# EAGLE board schemat (EAGLE 7.2.0)
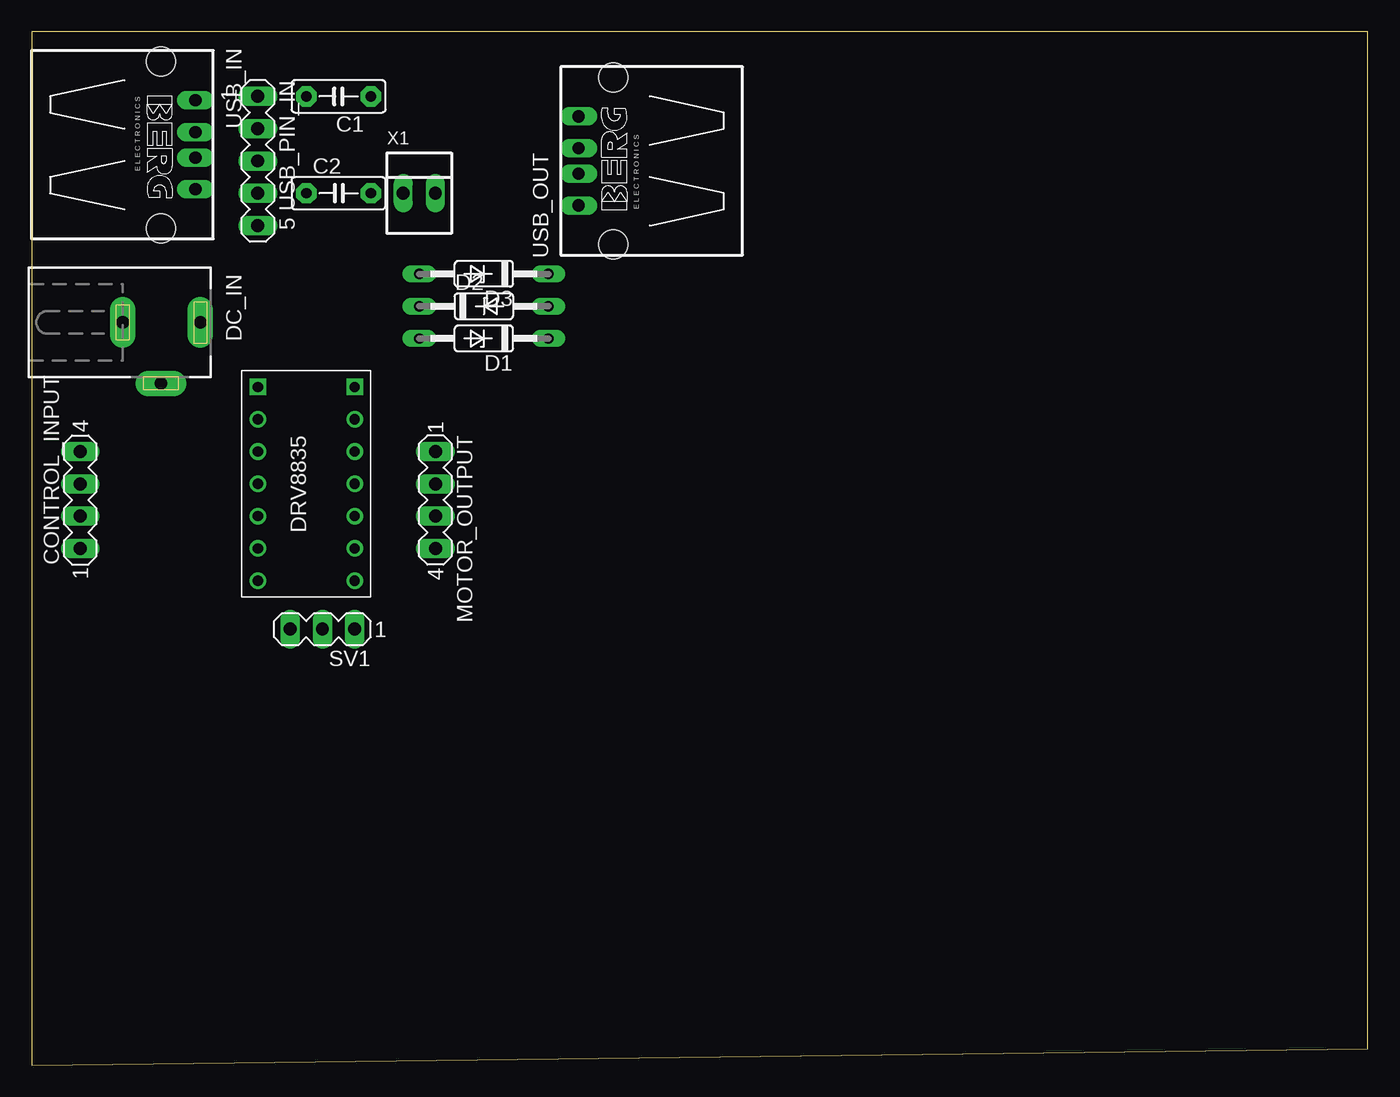
[diagram p0: board, top side]
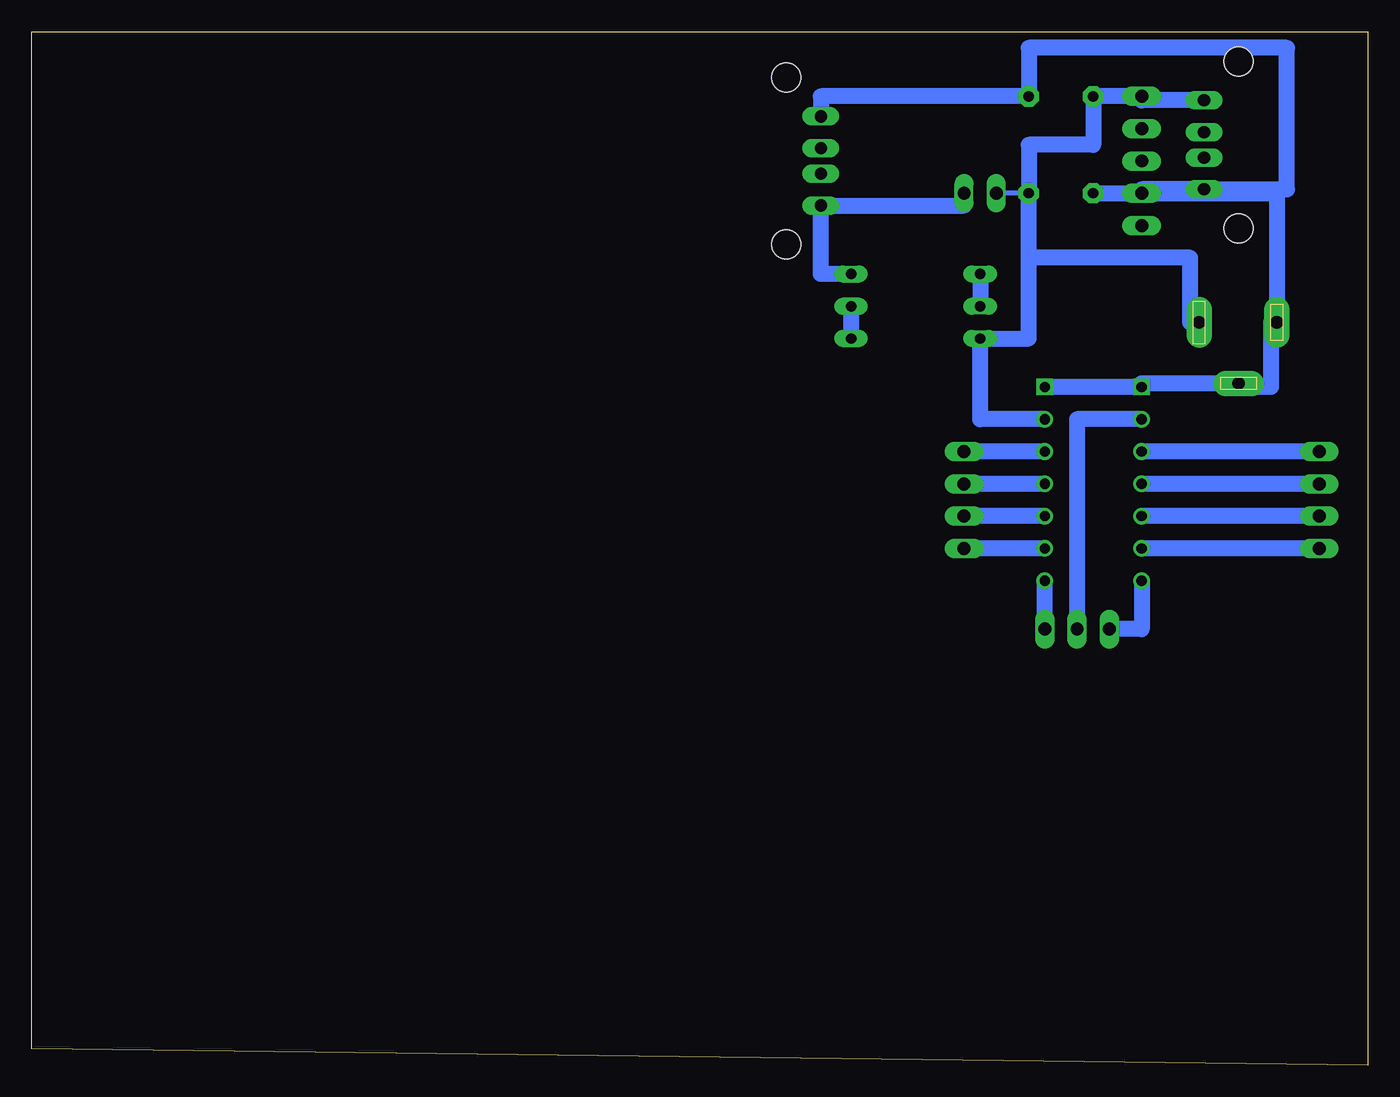
[diagram p1: board, bottom side, seen from below]

Size 105.08 x 81.27 mm. Coordinates in mm from the lower left corner, seen from the top.
Outline: 0,0 105.08,1.27 105.08,81.27 0,81.27 0,0
Copper layers (1*16): Top 0.035mm / dielectric 1.5mm / Bottom 0.035mm
Design rules "default *": minimum track width 15mil, minimum drill 24mil, track to track 8mil, track to pad 8mil, pad to pad 8mil, via to via 8mil, smd to smd 8mil, copper to edge 40mil, drill to drill 8mil, minimum pad ring 10mil, minimum via ring 8mil, stop-mask expansion 4mil, vias tented up to drill 0mil, thermal gap 10mil

## Footprints (pad centres in the part's own frame; a part is rotated, then mirrored left to right if it is on the bottom)
C5B2.5 = drill 0.813 pad 1.6 octagon: 1 -2.54,0; 2 2.54,0
MA04-1 = drill 1.016 long: 1 -3.81,0; 2 -1.27,0; 3 1.27,0; 4 3.81,0
DO35Z10 = drill 0.813 long: A 5.08,0; C -5.08,0
DCJ0202 = drill 1 pad 2 long: 1 0,3.1; 2 4.8,0; 3 0,-3
MA03-1 = drill 1.016 long: 1 -2.54,0; 2 0,0; 3 2.54,0
POLOLU_MOTOR_DRV_DRV8835 = drill 0.8: AENBL 1.27,6.35; AOUT1 8.89,3.81; AOUT2 8.89,6.35; APHASE 1.27,3.81; BENBL 1.27,11.43; BOUT1 8.89,8.89; BOUT2 8.89,11.43; BPHASE 1.27,8.89; MODE 1.27,1.27; VCC 1.27,13.97; VIN 8.89,13.97; VMM 8.89,1.27 | drill 0.8 square: LGND 1.27,16.51; MGND 8.89,16.51
PN87520 = drill 0.95 long: 1 -3.5,2.71; 2 -1,2.71; 3 1,2.71; 4 3.5,2.71 | hole 2.3: -6.57,0; 6.57,0
MA05-1 = drill 1.016 long: 1 -5.08,0; 2 -2.54,0; 3 0,0; 4 2.54,0; 5 5.08,0
22-23-2021 = drill 1 long: 1 -1.27,0; 2 1.27,0

## Placement (x,y rotation side)
C1  [C5B2.5]  24.13,76.2 180 top
C2  [C5B2.5]  24.13,68.58 0 top
CONTROL_INPUT  [MA04-1]  3.81,44.45 90 top
D1  1N821  [DO35Z10]  35.56,57.15 180 top
D2  1N821  [DO35Z10]  35.56,59.69 0 top
D3  1N821  [DO35Z10]  35.56,62.23 180 top
DC_IN  DCJ0202  [DCJ0202]  10.16,58.42 270 top
MOTOR_OUTPUT  [MA04-1]  31.75,44.45 270 top
SV1  [MA03-1]  22.86,34.29 180 top
U$1  POLOLU_MOTOR_DRV8835THROUGHHOLE  [POLOLU_MOTOR_DRV_DRV8835]  16.51,36.83 0 top
USB_IN  [PN87520]  10.16,72.39 270 top
USB_OUT  [PN87520]  45.72,71.12 90 top
USB_PIN_IN  [MA05-1]  17.78,71.12 270 top
X1  22-23-2021  [22-23-2021]  30.48,68.58 0 top

## Library data of the parts
C1 C2 = capacitor-wima
CONTROL_INPUT MOTOR_OUTPUT SV1 USB_PIN_IN = con-lstb; OC_FARNELL: unknown; OC_NEWARK: unknown
D1-D3 = diode
DC_IN = con-jack; OC_FARNELL: unknown; OC_NEWARK: unknown
U$1 = pololu
USB_IN USB_OUT = con-berg; OC_FARNELL: unknown; OC_NEWARK: unknown
X1 = con-molex; MF: MOLEX; MPN: 22-23-2021; OC_FARNELL: 1462926; OC_NEWARK: 25C3832

## Nets
GND: C1.1 C2.1 DC_IN.2 DC_IN.3 U$1.LGND U$1.MGND USB_IN.4 USB_OUT.4 USB_PIN_IN.4
N$1: SV1.2 U$1.VCC
N$2: SV1.3 U$1.MODE
N$3: CONTROL_INPUT.1 U$1.APHASE
N$4: CONTROL_INPUT.2 U$1.AENBL
N$5: CONTROL_INPUT.3 U$1.BPHASE
N$6: CONTROL_INPUT.4 U$1.BENBL
N$7: MOTOR_OUTPUT.1 U$1.BOUT2
N$8: MOTOR_OUTPUT.2 U$1.BOUT1
N$9: MOTOR_OUTPUT.3 U$1.AOUT2
N$10: MOTOR_OUTPUT.4 U$1.AOUT1
N$11: SV1.1 U$1.VMM
N$12: D3.C USB_OUT.1 X1.2
N$13: D1.C D2.A
N$14: D2.C D3.A
VCC: C1.2 C2.2 D1.A DC_IN.1 U$1.VIN USB_IN.1 USB_PIN_IN.1 X1.1

## Tracks (layer width: path | path; a pad name or v marks a point on that pad's centre or on a via)
GND
  Bottom 0.406: 17.78,68.89 USB_PIN_IN.4 C2.1 | 17.78,53.62 U$1.LGND | 6.35,68.89 6.35,68.58 7.16,68.58 | DC_IN.3 7.62,58.42 | 10.16,53.34 DC_IN.2
  Bottom 1.27: 17.78,68.89 USB_IN.4 6.35,68.89 6.35,80.01 26.67,80.01 C1.1 43.01,76.2 USB_OUT.4 | DC_IN.2 17.78,53.62 | U$1.LGND U$1.MGND | DC_IN.3 7.16,68.58 C2.1 | 7.62,58.42 7.62,53.34 10.16,53.34
N$1
  Bottom 1.27: U$1.VCC 22.86,50.8 SV1.2
N$2
  Bottom 1.27: U$1.MODE 17.78,34.29 SV1.3
N$3
  Bottom 1.27: CONTROL_INPUT.1 U$1.APHASE
N$4
  Bottom 1.27: CONTROL_INPUT.2 U$1.AENBL
N$5
  Bottom 1.27: CONTROL_INPUT.3 U$1.BPHASE
N$6
  Bottom 1.27: CONTROL_INPUT.4 U$1.BENBL
N$7
  Bottom 1.27: U$1.BOUT2 MOTOR_OUTPUT.1
N$8
  Bottom 1.27: U$1.BOUT1 MOTOR_OUTPUT.2
N$9
  Bottom 1.27: U$1.AOUT2 MOTOR_OUTPUT.3
N$10
  Bottom 1.27: U$1.AOUT1 MOTOR_OUTPUT.4
N$11
  Bottom 1.27: SV1.1 U$1.VMM
N$12
  Bottom 0.406: 31.75,67.62 X1.2
  Bottom 1.27: 31.75,67.62 USB_OUT.1 43.01,62.23 D3.C
N$13
  Bottom 1.27: D2.A D1.C
N$14
  Bottom 1.27: D3.A D2.C
VCC
  Bottom 0.406: 17.78,75.89 USB_PIN_IN.1 | DC_IN.1 13.97,58.42 | C2.2 X1.1
  Bottom 1.27: USB_IN.1 17.78,75.89 | USB_PIN_IN.1 C1.2 21.59,72.39 26.67,72.39 C2.2 26.67,63.5 | 13.97,58.42 13.97,63.5 26.67,63.5 | U$1.VIN 30.48,50.8 D1.A 26.67,57.15 26.67,63.5